# Altium PCB PCB2.PcbDoc
Units mil, origin at the board's own origin, x right, y up, seen from the top; angles counter-clockwise.
Board outline 6000 x 4000 mil, 2 copper layers (Top Layer, Bottom Layer); 17 components, 12 nets, 66 pads, 0 vias.
Unrouted connection lines stored in the file: 36.
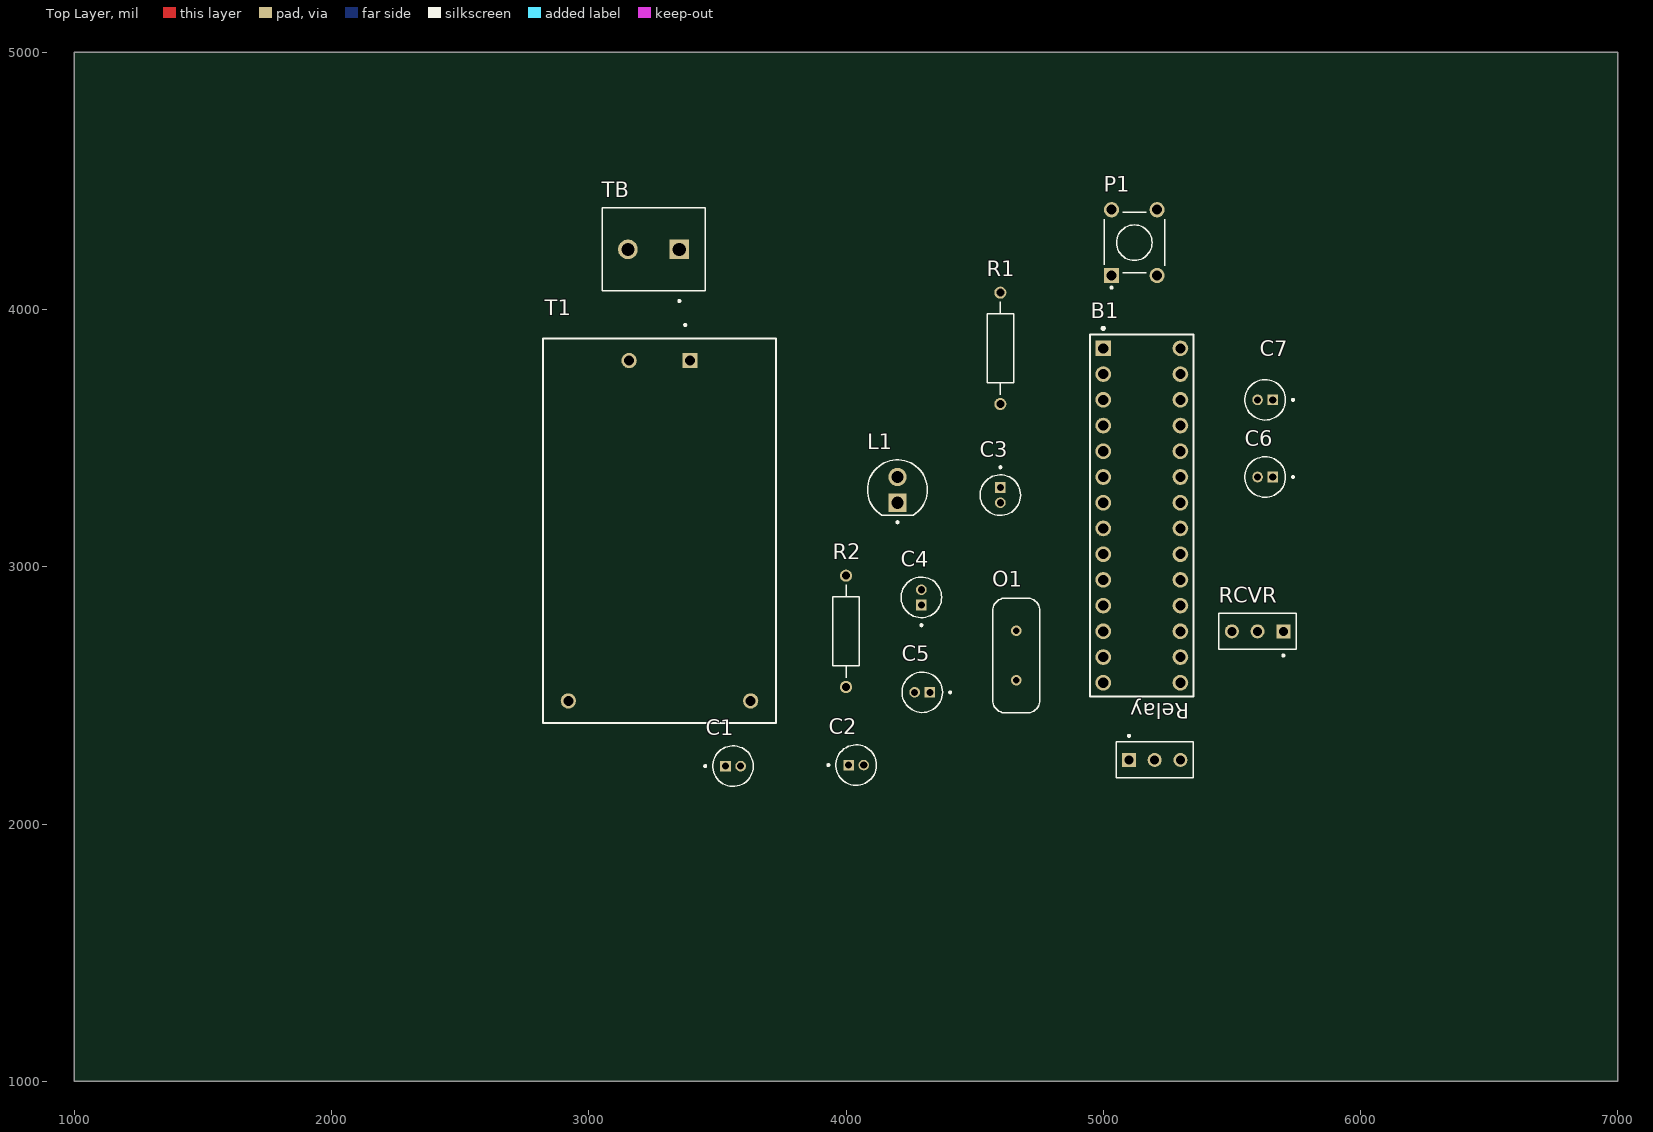
[diagram p0: Top Layer view]
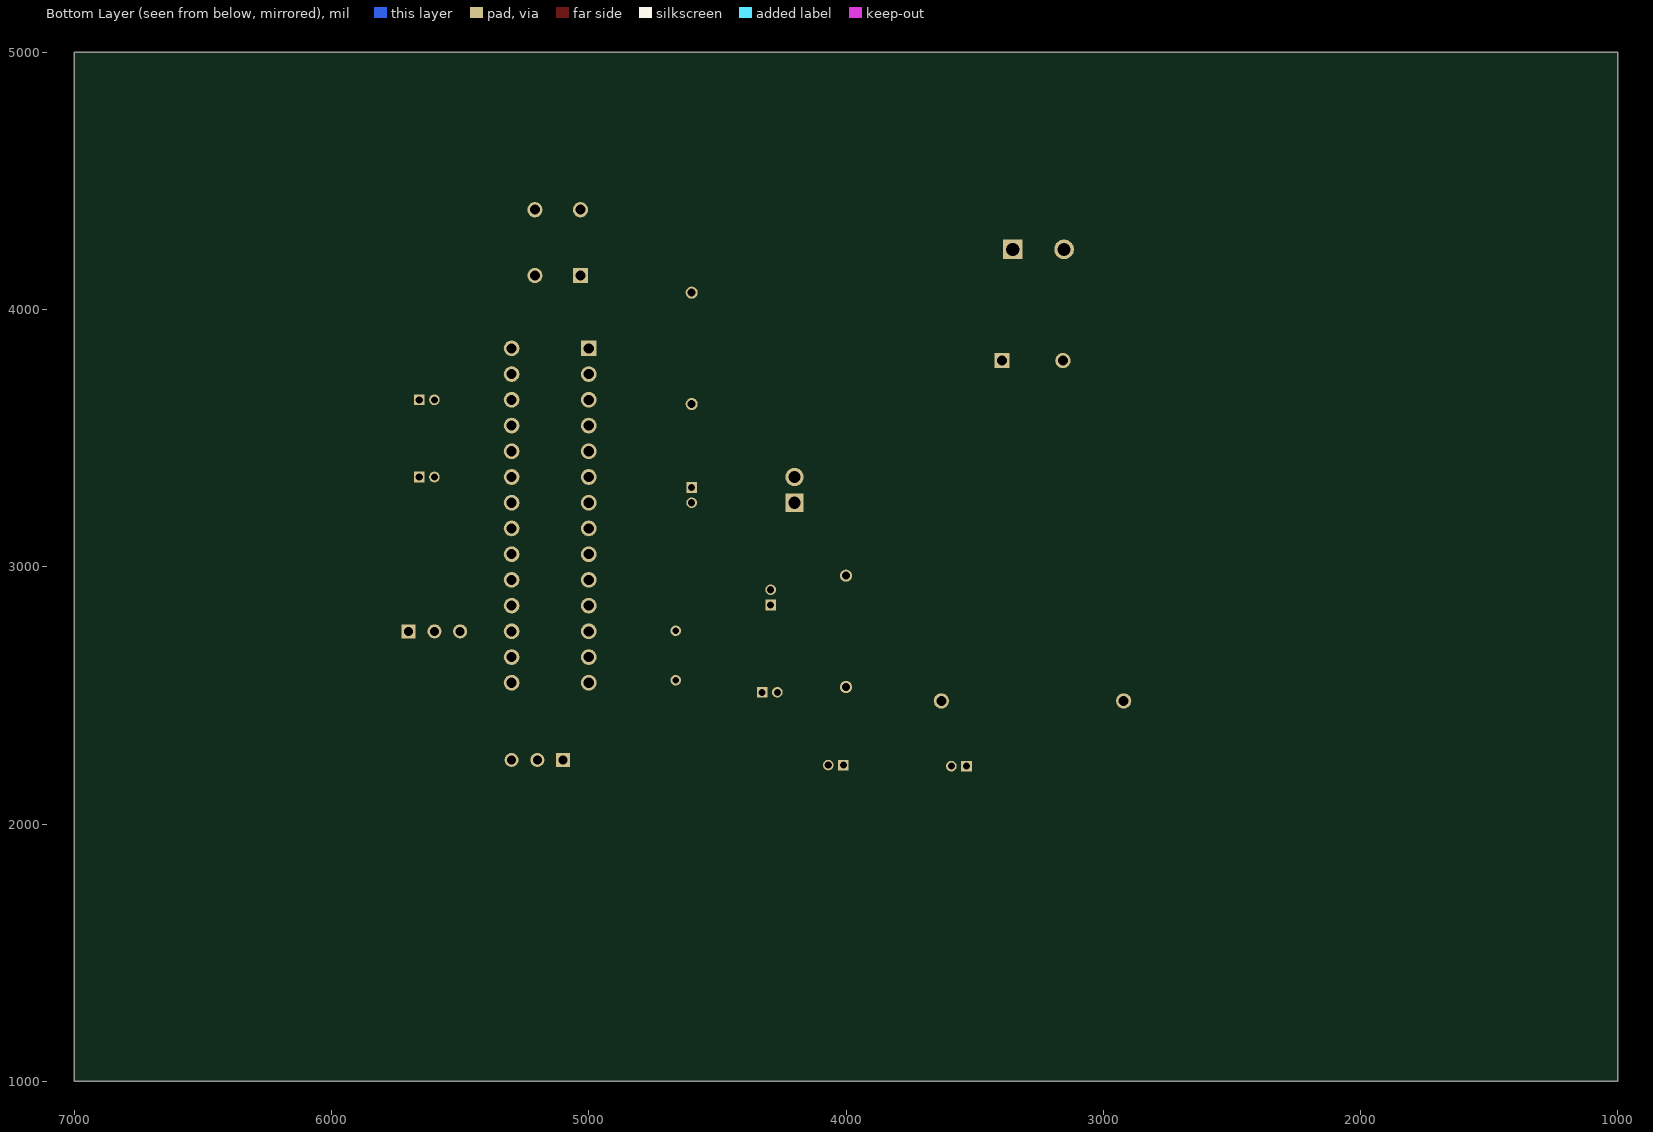
[diagram p1: Bottom Layer view, seen from below]

## Layer stack, top to bottom
Top Solder: solder mask 0.4, Solder Resist, Dk 3.5
Top Layer: signal copper 1.4
Dielectric 1: dielectric 12.6, FR-4, Dk 4.8
Bottom Layer: signal copper 1.4
Bottom Solder: solder mask 0.4, Solder Resist, Dk 3.5

## Board outline
1000,1000 7000,1000 7000,5000 1000,5000

## Design rules (kind name [scope] priority, off if disabled: settings)
Clearance [All] p1: gap=10 ignorepadtopadclearanceinfootprint=FALSE except(0: Arc-Hole Track-Hole SMDPad-Hole THPad-Hole Via-Hole Fill-Hole Poly-Hole Region-Hole Text-Hole)
PolygonConnect [All] p1: connectstyle=Relief reliefconductorwidth=10 reliefentries=4 polygonreliefangle="90 Angle" airgapwidth=10
RoutingVias [All] p1: holewidth=28 width=50 viastyle="Through Hole" minholewidth=28 minwidth=50 maxholewidth=28 maxwidth=50
SolderMaskExpansion [All] p1: expansion=4 istentingtop=FALSE
Width [All] p1: maxlimit=10 minlimit=10 preferedwidth=10
30 further rules are at their usual default settings.

## Components (designator, comment, footprint, x,y, rotation, side; value= is the part's Value field where it differs from the comment)
B1 "1-2199298-8" FP-1-2199298-9-MFG 5150,3199 r270 top
C1 "K102K15X7RF5TL2" 10uF_Capacitor 3561,2225 r0 top value=1nF
C2 "EEA-GA1C100" 10uF_Capacitor 4039.53,2229 r0 top
C3 "EEA-GA1C100" 10uF_Capacitor 4600,3278.53 r270 top
C4 "S220K25SL0N63L6R" 10uF_Capacitor 4293,2881 r90 top
C5 "S220K25SL0N63L6R" 10uF_Capacitor 4296.47,2512 r180 top
C6 "EEA-GA1C100" 10uF_Capacitor 5629.53,3349 r180 top
C7 "EEA-GA1C100" 10uF_Capacitor 5629.53,3649 r180 top
L1 "WP7113SRD/J4" LEDRD254W57D500H1070 4200,3299 r90 top
O1 "ECS-160-20-4_1" Oscillator 4662,2655.06 r270 top value=16MHz
P1 "COM-00097" P_button 5121,4260 r90 top
R1 "CFM12JT1K00" Resister 4600,3849 r90 top value=1kR
R2 "CFM12JT220R" Resister 4000,2749 r270 top value=220R
RCVR "61300311121" Female 5600,2749 r180 top
Relay "61300311121" Female 5200,2249 r0 top
T1 "Transformer" HILINK 3275,3140 r270 top
TB "TB006-508-02BE" terminalbox 3352,4234 r180 top

## Footprints (in the part's own frame and the unit in brackets; to place one, negate y for a bottom-side part, rotate by r counter-clockwise, add the part's x,y. Pads: shape width x height; smd on the part's side, far side on the other; paste and mask are expansions set on the pad)
10uF_Capacitor [mm]
  rect 1.05x1.05 hole 0.7: 1(-0.75,0)
  round 1.05 hole 0.7: 2(0.75,0)
  silkscreen extent -2.85,-2 2,2, body extent -2,-2 2,2, height 7
Female [mm]
  rect 1.388x1.388 hole 0.88: 1(-2.54,0)
  round 1.388 hole 0.88: 2(0,0) 3(2.54,0)
  silkscreen extent -3.81,-1.78 3.81,2.48, body extent -3.81,-1.78 3.81,1.78, height 6.74
FP-1-2199298-9-MFG [mm]
  rect 1.55x1.55 hole 1 paste-1000 mask+0: 1(-16.51,-3.81)
  round 1.55 hole 1 paste-1000 mask+0: 2(-13.97,-3.81) 3(-11.43,-3.81) 4(-8.89,-3.81) 5(-6.35,-3.81) 6(-3.81,-3.81) 7(-1.27,-3.81) 8(1.27,-3.81) 9(3.81,-3.81) 10(6.35,-3.81) 11(8.89,-3.81) 12(11.43,-3.81) 13(13.97,-3.81) 14(16.51,-3.81) 15(16.51,3.81) 16(13.97,3.81) 17(11.43,3.81) 18(8.89,3.81) 19(6.35,3.81) 20(3.81,3.81) 21(1.27,3.81) 22(-1.27,3.81) 23(-3.81,3.81) 24(-6.35,3.81) 25(-8.89,3.81) 26(-11.43,3.81) 27(-13.97,3.81) 28(-16.51,3.81)
  silkscreen extent -18.6,-5.1 17.88,5.1, body extent -17.98,-5.2 17.98,5.2, height 0.25
HILINK [mm]
  rect 1.508x1.508 / inner round 1.508 / far side rect 1.508x1.508 hole 1: 1(-16.8,3)
  round 1.508 hole 1: 2(-16.8,-3) 3(16.8,9) 4(16.8,-9)
  silkscreen extent -20.42,-11.5 19,11.5, body extent -17,-10.1 17,10.1, height 15
LEDRD254W57D500H1070 [mm]
  round 1.815 hole 1.21: 1(1.27,0)
  rect 1.815x1.815 / inner round 1.815 / far side rect 1.815x1.815 hole 1.21: 2(-1.27,0)
  silkscreen extent -3.3,-2.96 2.96,2.96, body extent -2.6,-2.95 2.95,2.95, height 9.1
Oscillator [mm]
  round 1.03 hole 0.63: 1(-2.44,0) 2(2.44,0)
  silkscreen extent -5.68,-2.33 5.68,2.33, body extent -5.68,-2.32 5.68,2.32, height 3.51
P_button [mm]
  rect 1.498x1.498 / inner round 1.498 / far side rect 1.498x1.498 hole 0.99: 1(-3.25,2.25)
  round 1.498 hole 0.99: 2(-3.25,-2.25) 3(3.25,-2.25) 4(3.25,2.25)
  silkscreen extent -4.54,-3 3,3, body extent -3.9,-3 3.9,3, height 5.01
Resister [mm]
  round 1.2 hole 0.8: 1(-5.5,0) 2(5.5,0)
  silkscreen extent -4.58,-1.3 4.58,1.3, body extent -5.77,-1.3 5.77,1.3, height 2.6
terminalbox [mm]
  rect 1.95x1.95 / inner round 1.95 / far side rect 1.95x1.95 hole 1.3: 1(0,0)
  round 1.95 hole 1.3: 2(5.08,0)
  silkscreen extent -2.54,-4.1 7.62,5.2

## Part data
B1: "IC Socket", Manufacturer="TE Connectivity", Manufacturer Series=2199298, Supplier Part Number=571-1-2199298-8, Category="IC and Component Sockets", ComponentLink1Description=https://www.te.com:443/usa-en/product-1-2199298-8.datasheet.pdf?src-supplier=IHS+Markit, ComponentLink1URL=https://www.te.com:443/usa-en/product-1-2199298-8.datasheet.pdf?src-supplier=IHS+Markit, ComponentLink2Description=http://www.alliedelec.com/m/d/1cf61418f54f295ea6d222d573753863.pdf?src-supplier=Allied+Electronics, ComponentLink2URL=http://www.alliedelec.com/m/d/1cf61418f54f295ea6d222d573753863.pdf?src-supplier=Allied+Electronics, ComponentLink3Description=https://www.te.com/commerce/DocumentDelivery/DDEController?Action=srchrtrv&amp;DocNm=2199298&amp;DocType=Customer+Drawing&amp;DocLang=English&src-supplier=Digi-Key, ComponentLink3URL=https://www.te.com/commerce/DocumentDelivery/DDEController?Action=srchrtrv&amp;DocNm=2199298&amp;DocType=Customer+Drawing&amp;DocLang=English&src-supplier=Digi-Key, ComponentLink4Description=http://www.te.com/commerce/DocumentDelivery/DDEController?Action=showdoc&DocId=Customer+Drawing%7F2199298%7FA%7Fpdf%7FEnglish%7FENG_CD_2199298_A_baseFilename.pdf&src-supplier=Avnet, ComponentLink4URL=http://www.te.com/commerce/DocumentDelivery/DDEController?Action=showdoc&DocId=Customer+Drawing%7F2199298%7FA%7Fpdf%7FEnglish%7FENG_CD_2199298_A_baseFilename.pdf&src-supplier=Avnet, Contact Finish - Mating=TIN, Contact Material=Bronze, Device Socket Type="IC SOCKET", Manufacturer Part Number=1-2199298-8, Pricing="1=0.39, 10=0.379, 50=0.379, 100=0.379, 1000=0.379, 10000=0.307 (USD)", Reach SVHC Compliant=Yes, RoHS=Yes, RoHS Compliant=Yes, Stock=5353, Supplier=Mouser
C1: "Ceramic Capacitor, Multilayer, Ceramic, 50V, 10% +Tol, 10% -Tol, X7R, 15% TC, 0.001uF, Through Hole Mount", Capacitance=1nF, Capacitor Type=Ceramic, Manufacturer="Vishay BCcomponents", Max Operating Temperature=125°C, Min Operating Temperature=-55°C, Package Shape=Rectangular, Package Style=RadialMeter, Rated DC Voltage (URdc)=50V, Supplier Part Number=594-K102K15X7RF5TL2, Temperature Characteristics Code=X7R, Tolerance  (fill in as +-)=10%, Category="Ceramic Capacitors", ComponentLink1Description=https://datasheet.ciiva.com:443/pdfs/VipMasterIC/IC/VISH/VISHS88539/VISHS88539-1.pdf?src-supplier=IHS+Markit, ComponentLink1URL=https://datasheet.ciiva.com:443/pdfs/VipMasterIC/IC/VISH/VISHS88539/VISHS88539-1.pdf?src-supplier=IHS+Markit, ComponentLink2Description=https://datasheet.ciiva.com/145/kseries-145600.pdf?src-supplier=Digi-Key, ComponentLink2URL=https://datasheet.ciiva.com/145/kseries-145600.pdf?src-supplier=Digi-Key, ComponentLink3Description=https://datasheet.ciiva.com/18442/70121924-18442616.pdf?src-supplier=Allied+Electronics, ComponentLink3URL=https://datasheet.ciiva.com/18442/70121924-18442616.pdf?src-supplier=Allied+Electronics, ComponentLink4Description=https://datasheet.ciiva.com/46394/1756139-46394540.pdf?src-supplier=Element14, ComponentLink4URL=https://datasheet.ciiva.com/46394/1756139-46394540.pdf?src-supplier=Element14, ComponentLink5Description=https://datasheet.ciiva.com/7974/1682830-7974760.pdf?src-supplier=Element14, ComponentLink5URL=https://datasheet.ciiva.com/7974/1682830-7974760.pdf?src-supplier=Element14, ComponentLink6Description=https://datasheet.ciiva.com/145/kseries-145599.pdf?src-supplier=Digi-Key, ComponentLink6URL=https://datasheet.ciiva.com/145/kseries-145599.pdf?src-supplier=Digi-Key, Dielectric Material=Ceramic, Height=5.58mm, JESD-609 Code=e3, Length=4mm, Manufacturer Part Number=K102K15X7RF5TL2, Mounting Technology="Through Hole", Multilayer=Yes, Packaging="Tape and Reel", Pins=2, Pricing="1=0.23, 10=0.104, 50=0.104, 100=0.06, 1000=0.053, 10000=0.041 (USD)", Reach SVHC Compliant=Yes, RoHS=Yes, RoHS Compliant=Yes, Stock=24201, Supplier=Mouser, Terminal Finish=Tin, Terminal Pitch=2.5mm, Termination=Wire, Tolerance (fill in as +-)=10%, Voltage=50V, Width=2.5mm
C2 C3 C6 C7: "Aluminum Electrolytic Capacitor, Polarized, Aluminum (wet), 16V, 20% +Tol, 20% -Tol, 10uF, Through Hole Mount", Capacitance=10uF, Capacitor Type=Aluminium, Leakage Current=3uA, Manufacturer=Panasonic, Manufacturer Series=GA, Max Operating Temperature=105°C, Min Operating Temperature=-55°C, Package Shape=Cylindrical, Package Style=RadialMeter, Rated DC Voltage (URdc)=16V, Ripple Current=30mA, Supplier Part Number=667-EEA-GA1C100, Tolerance  (fill in as +-)=20%, Category="Aluminum Electrolytic Capacitors", ComponentLink1Description=https://datasheet.ciiva.com:443/pdfs/VipMasterIC/IC/PANA/PANA-S-A0007980152/PANA-S-A0007980152-1.pdf?src-supplier=IHS+Markit, ComponentLink1URL=https://datasheet.ciiva.com:443/pdfs/VipMasterIC/IC/PANA/PANA-S-A0007980152/PANA-S-A0007980152-1.pdf?src-supplier=IHS+Markit, ComponentLink2Description=https://datasheet.ciiva.com/11783/0900766b800bd184-11783675.pdf?src-supplier=Rs, ComponentLink2URL=https://datasheet.ciiva.com/11783/0900766b800bd184-11783675.pdf?src-supplier=Rs, ComponentLink3Description=https://datasheet.ciiva.com/30132/61aba0000ce99-30132280.pdf?src-supplier=Onlinecomponents.com, ComponentLink3URL=https://datasheet.ciiva.com/30132/61aba0000ce99-30132280.pdf?src-supplier=Onlinecomponents.com, ComponentLink4Description=https://datasheet.ciiva.com/2984/aba0000ce99-2984970.pdf?src-supplier=Avnet, ComponentLink4URL=https://datasheet.ciiva.com/2984/aba0000ce99-2984970.pdf?src-supplier=Avnet, ComponentLink5Description=https://datasheet.ciiva.com/14606/70256146-14606495.pdf?src-supplier=Allied+Electronics, ComponentLink5URL=https://datasheet.ciiva.com/14606/70256146-14606495.pdf?src-supplier=Allied+Electronics, ComponentLink6Description=https://datasheet.ciiva.com/43461/1521263-43461069.pdf?src-supplier=Farnell, ComponentLink6URL=https://datasheet.ciiva.com/43461/1521263-43461069.pdf?src-supplier=Farnell, ComponentLink7Description=https://datasheet.ciiva.com/24024/aba0000ce99-48764-24024622.pdf?src-supplier=Mouser, ComponentLink7URL=https://datasheet.ciiva.com/24024/aba0000ce99-48764-24024622.pdf?src-supplier=Mouser, Diameter=4mm, Dielectric Material=Aluminium, JESD-609 Code=e3, Length=7mm, Manufacturer Part Number=EEA-GA1C100, Mounting Technology="Through Hole", Packaging=Bulk, Pins=2, Polarity=Polarized, Pricing="1=0.32, 10=0.216, 50=0.144, 100=0.123, 1000=0.086, 10000=0.086 (USD)", Reach SVHC Compliant=Yes, RoHS=Yes, RoHS Compliant=Yes, Series=EEA-GA, Stock=3224, Supplier=Mouser, Tan Delta=0.18, Terminal Finish=Tin, Terminal Pitch=1.5mm, Termination=Wire, Tolerance (fill in as +-)=20%, Voltage=16V
C4 C5: "Ceramic Capacitor, Ceramic, 1000V, 10% +Tol, 10% -Tol, SL0, 120ppm/Cel TC, 0.000022uF, Through Hole Mount", Capacitance=22pF, Capacitor Type=Ceramic, Manufacturer="Vishay BCcomponents", Supplier Part Number=594-S220K25SL0N63L6R, Voltage=16V, Category="Ceramic Capacitors", ComponentLink1Description=https://datasheet.ciiva.com:443/pdfs/VipMasterIC/IC/VISH/VISH-S-A0003941534/VISH-S-A0003941534-1.pdf?src-supplier=IHS+Markit, ComponentLink1URL=https://datasheet.ciiva.com:443/pdfs/VipMasterIC/IC/VISH/VISH-S-A0003941534/VISH-S-A0003941534-1.pdf?src-supplier=IHS+Markit, ComponentLink2Description=https://datasheet.ciiva.com/148/geninfo-cd-rfi-safcaps-148963.pdf?src-supplier=Digi-Key, ComponentLink2URL=https://datasheet.ciiva.com/148/geninfo-cd-rfi-safcaps-148963.pdf?src-supplier=Digi-Key, ComponentLink3Description=https://datasheet.ciiva.com/7974/gapkap-7974888.pdf?src-supplier=Element14, ComponentLink3URL=https://datasheet.ciiva.com/7974/gapkap-7974888.pdf?src-supplier=Element14, Dielectric Material=Ceramic, Manufacturer Part Number=S220K25SL0N63L6R, Pins=2, Pricing="1=0.4, 10=0.197, 50=0.197, 100=0.169, 1000=0.107, 10000=0.095 (USD)", RoHS=Yes, RoHS Compliant=Yes, Stock=23582, Supplier=Mouser
L1: "LED Uni-Color SB. Red 660nm 2-Pin T-1 3/4 Bulk", Manufacturer=Kingbright, Supplier Part Number=754-2139-ND, Category=LEDs, ComponentLink1Description=http://www.kingbrightusa.com/images/catalog/SPEC/WP7113SRD-J4.pdf?src-supplier=Digi-Key, ComponentLink1URL=http://www.kingbrightusa.com/images/catalog/SPEC/WP7113SRD-J4.pdf?src-supplier=Digi-Key, Manufacturer Part Number=WP7113SRD/J4, Pricing="1=0.69, 10=0.448, 100=0.2936, 1000=0.23175, 2000=0.2163, 5000=0.20858, 10000=0.20549, 25000=0.20085 (USD)", RoHS=No, Stock=14375, Supplier=Digi-Key
O1: Package=None, Availability=Unavailable, MP=ECS-160-20-4, Price=None
P1: "CONN HEADER SMD 28POS 0.8MM", Manufacturer=SparkFun, Supplier Part Number=1568-COM-00097-ND, Category="Tactile Switches", Manufacturer Part Number=COM-00097, Pricing="1=0.45 (USD)", RoHS=No, Supplier=Digi-Key
R1: "Fixed Resistor, Carbon Film, 0.5W, 1000ohm, 350V, 5% +/-Tol, -400,0ppm/Cel, Through Hole Mount", Manufacturer="Stackpole Electronics", Max Operating Temperature=155°C, Min Operating Temperature=-55°C, Package Diameter=2.3mm, Package Length=6mm, Package Shape=Tubular, Package Style=AxialMeter, Power=500mW, Rated Temperature=70°C, Resistance=1K, Resistor Type="FIXED RESISTOR", Supplier Part Number=S1KHCT-ND, Temperature Coefficient=400ppm/°C, Tolerance=5%, Working Voltage=350V, Category="Through-Hole Resistors", ComponentLink1Description=https://datasheet.ciiva.com:443/pdfs/VipMasterIC/IC/SEIE/SEIE-S-A0009883960/SEIE-S-A0009883960-1.pdf?src-supplier=IHS+Markit, ComponentLink1URL=https://datasheet.ciiva.com:443/pdfs/VipMasterIC/IC/SEIE/SEIE-S-A0009883960/SEIE-S-A0009883960-1.pdf?src-supplier=IHS+Markit, ComponentLink2Description=http://components.arrow.com/part/dataview/51859118S46073N1174?src-supplier=Arrow+Electronics, ComponentLink2URL=http://components.arrow.com/part/dataview/51859118S46073N1174?src-supplier=Arrow+Electronics, ComponentLink3Description=https://www.seielect.com/Catalog/SEI-CF_CFM.pdf?src-supplier=Digi-Key, ComponentLink3URL=https://www.seielect.com/Catalog/SEI-CF_CFM.pdf?src-supplier=Digi-Key, ComponentLink4Description=https://www.seielect.com/catalog/SEI-Packaging.pdf?src-supplier=Digi-Key, ComponentLink4URL=https://www.seielect.com/catalog/SEI-Packaging.pdf?src-supplier=Digi-Key, ComponentLink5Description=https://www.seielect.com/catalog/SEI-CF_CFM.pdf?src-supplier=Avnet, ComponentLink5URL=https://www.seielect.com/catalog/SEI-CF_CFM.pdf?src-supplier=Avnet, ComponentLink6Description=https://www.verical.com/server-webapp/html/getDatasheet?partID=470997&src-supplier=Verical, ComponentLink6URL=https://www.verical.com/server-webapp/html/getDatasheet?partID=470997&src-supplier=Verical, Construction=Tubular, JESD-609 Code=e3, Lead Diameter=0.55mm, Lead Length=28mm, Manufacturer Part Number=CFM12JT1K00, Mounting Technology="Through Hole", Packaging="Tape and Reel", Pins=2, Pricing="1=0.1, 10=0.067, 25=0.0488, 50=0.0372, 100=0.0274, 250=0.02092, 500=0.01672, 1000=0.01231 (USD)", Reach SVHC Compliant=Yes, RoHS=Yes, RoHS Compliant=Yes, Stock=145304, Supplier=Digi-Key, Technology="CARBON FILM", Terminal Finish=Tin, Termination=Wire
R2: "Fixed Resistor, Carbon Film, 0.5W, 220ohm, 350V, 5% +/-Tol, -400,0ppm/Cel, Through Hole Mount", Manufacturer="Stackpole Electronics", Max Operating Temperature=155°C, Min Operating Temperature=-55°C, Package Diameter=2.3mm, Package Length=6mm, Package Shape=Tubular, Package Style=AxialMeter, Power=500mW, Rated Temperature=70°C, Resistance=220, Resistor Type="FIXED RESISTOR", Supplier Part Number=S220HTR-ND, Temperature Coefficient=400ppm/°C, Tolerance=5%, Working Voltage=350V, Category="Through-Hole Resistors", ComponentLink1Description=https://datasheet.ciiva.com:443/pdfs/VipMasterIC/IC/SEIE/SEIE-S-A0009883960/SEIE-S-A0009883960-1.pdf?src-supplier=IHS+Markit, ComponentLink1URL=https://datasheet.ciiva.com:443/pdfs/VipMasterIC/IC/SEIE/SEIE-S-A0009883960/SEIE-S-A0009883960-1.pdf?src-supplier=IHS+Markit, ComponentLink2Description=https://www.seielect.com/catalog/SEI-CF_CFM.pdf?src-supplier=Avnet, ComponentLink2URL=https://www.seielect.com/catalog/SEI-CF_CFM.pdf?src-supplier=Avnet, ComponentLink3Description=https://www.seielect.com/Catalog/SEI-CF_CFM.pdf?src-supplier=Digi-Key, ComponentLink3URL=https://www.seielect.com/Catalog/SEI-CF_CFM.pdf?src-supplier=Digi-Key, Construction=Tubular, JESD-609 Code=e3, Lead Diameter=0.55mm, Lead Length=28mm, Manufacturer Part Number=CFM12JT220R, Mounting Technology="Through Hole", Packaging="Tape and Reel", Pins=2, Pricing="5000=0.00883, 10000=0.00767, 25000=0.00674, 50000=0.00618, 125000=0.00605 (USD)", Reach SVHC Compliant=Yes, RoHS=Yes, RoHS Compliant=Yes, Stock=15000, Supplier=Digi-Key, Technology="CARBON FILM", Terminal Finish=Tin, Termination=Wire
RCVR Relay: "Board Connector, 3 Contact(s), 1 Row(s), Male, Straight, 0.1 inch Pitch, Solder Terminal, Locking, Black Insulator, Plug", Contact Resistance=20mR, Dielectric Withstanding Voltage (AC)=500V, Insulation Color=Black, Insulation Resistance=1GR, Manufacturer="Wurth Electronics", Max Operating Temperature=125°C, Min Operating Temperature=-40°C, Rated Current (Signal)=3A, Supplier Part Number=732-5316-ND, Body Breadth=0.1inch, Body Depth=0.1inch, Body Length=0.3inch, Body/Shell Style=PLUG, Category=Uncategorized, ComponentLink1Description=https://datasheet.ciiva.com:443/pdfs/VipMasterIC/IC/MIDC/MIDCS07676/MIDCS07676-1.pdf?src-supplier=IHS+Markit, ComponentLink1URL=https://datasheet.ciiva.com:443/pdfs/VipMasterIC/IC/MIDC/MIDCS07676/MIDCS07676-1.pdf?src-supplier=IHS+Markit, ComponentLink2Description=http://www.farnell.com/cad/1737268.pdf?src-supplier=Element14, ComponentLink2URL=http://www.farnell.com/cad/1737268.pdf?src-supplier=Element14, ComponentLink3Description=https://katalog.we-online.de/em/datasheet/6130xx11121.pdf?src-supplier=Digi-Key, ComponentLink3URL=https://katalog.we-online.de/em/datasheet/6130xx11121.pdf?src-supplier=Digi-Key, Connector Type="BOARD CONNECTOR", Contact Finish - Mating=GOLD, Contact Finish - Termination="Gold (Au) - with Nickel (Ni) barrier", Contact Gender=Male, Contact Material="Copper Alloy", Contact Pattern=RECTANGULAR, Contact Style="SQ PIN-SKT", Insulation Material=Polybutylene, JESD-609 Code=e4, Manufacturer Part Number=61300311121, Mating Contact Pitch=0.1inch, Mounting Option 1=LOCKING, Mounting Style=STRAIGHT, Mounting Technology=Board, Number Of Connectors=1, Number of Contacts=3, Number of Rows Loaded=1, PCB Contact Pattern=RECTANGULAR, Pricing="1=0.13, 10=0.113, 25=0.094, 50=0.079, 100=0.071, 1000=0.066 (USD)", Reach SVHC Compliant=Yes, Reference Standard=UL, Reliability=COMMERCIAL, RoHS=Yes, RoHS Compliant=Yes, Stock=184286, Supplier=Digi-Key, Terminal Length=0.118inch, Terminal Pitch=2.54mm, Termination=Solder
T1: "5V 0.6A 90VAC~265VAC 120V~350V 3W AC-DC 73% Plugin Power Modules ROHS", Output Voltage=5V, Input Volatge=230V/50Hz
TB: "Barrier Strip Terminal Block", Manufacturer="CUI Devices", Supplier Part Number=490-TB006-508-02BE, Manufacturer Part Number=TB006-508-02BE, Pricing="1=0.86, 10=0.315, 50=0.315, 100=0.301, 1000=0.21, 10000=0.175 (USD)", RoHS=Yes, Stock=47338, Supplier=Mouser

## Nets (pads, with @x,y where several pads share a name; then routed paths per layer and width w, separated by ;. In a path a pad name is that pad's centre, name@x,y a point inside that pad or via, vN(x,y) a via of type N, cw(c..) or ccw(c..) an arc to the next point about the centre after c; other vN are vias at no path point)
+5V: B1.7 B1.20 B1.21 C1.1 C2.1 C3.1 C6.1 C7.1 L1.1 R1.1 RCVR.1 Relay.1 T1.4
GND: B1.8 B1.22 C1.2 C2.2 C3.2 C4.2 C5.2 C6.2 C7.2 P1.2 R2.2 RCVR.2 Relay.2 T1.3
NetB1_1: B1.1 P1.1 R1.2
NetB1_5: B1.5
NetB1_6: B1.6
NetB1_9: B1.9 C4.1 O1.1
NetB1_10: B1.10 C5.1 O1.2
NetB1_12: B1.12 Relay.3
NetB1_17: B1.17 RCVR.3
NetL1_2: L1.2 R2.1
NetT1_1: T1.1 TB.1
NetT1_2: T1.2 TB.2
pads on no net: B1.2 B1.3 B1.4 B1.11 B1.13 B1.14 B1.15 B1.16 B1.18 B1.19 B1.23 B1.24 B1.25 B1.26 B1.27 B1.28 P1.3 P1.4